# EAGLE board A20-OLinuXino-Lime2_SHIELD_TEMPLATE_Rev-AA (EAGLE 4.16)

No outline drawn. Coordinates in mm, seen from the top.
Copper layers (1*16): Top 0.035mm / dielectric 1.5mm / Bottom 0.035mm
Design rules "default": minimum track width 10mil, minimum drill 24mil, track to track 8mil, track to pad 8mil, pad to pad 8mil, via to via 8mil, smd to smd 8mil, copper to edge 40mil, drill to drill 8mil, minimum pad ring 10mil, minimum via ring 8mil, stop-mask expansion 4mil, vias tented up to drill 0mil, thermal gap 10mil

## Footprints (pad centres in the part's own frame; a part is rotated, then mirrored left to right if it is on the bottom)
A20_OLINUXINO_LIME2_SHIELD = smd 0.7 x 1.8 bottom: 1-1 -11.874,18.352; 1-2 -11.874,22.416; 1-3 -10.604,18.352; 1-4 -10.604,22.416; 1-5 -9.335,18.352; 1-6 -9.335,22.416; 1-7 -8.065,18.352; 1-8 -8.065,22.416; 1-9 -6.795,18.352; 1-10 -6.795,22.416; 1-11 -5.524,18.352; 1-12 -5.524,22.416; 1-13 -4.255,18.352; 1-14 -4.255,22.416; 1-15 -2.985,18.352; 1-16 -2.985,22.416; 1-17 -1.714,18.352; 1-18 -1.714,22.416; 1-19 -0.445,18.352; 1-20 -0.445,22.416; 1-21 0.826,18.352; 1-22 0.826,22.416; 1-23 2.095,18.352; 1-24 2.095,22.416; 1-25 3.365,18.352; 1-26 3.365,22.416; 1-27 4.636,18.352; 1-28 4.636,22.416; 1-29 5.905,18.352; 1-30 5.905,22.416; 1-31 7.176,18.352; 1-32 7.176,22.416; 1-33 8.445,18.352; 1-34 8.445,22.416; 1-35 9.716,18.352; 1-36 9.716,22.416; 1-37 10.986,18.352; 1-38 10.986,22.416; 1-39 12.255,18.352; 1-40 12.255,22.416; 2-1 -11.874,-22.288; 2-2 -11.874,-18.224; 2-3 -10.604,-22.288; 2-4 -10.604,-18.224; 2-5 -9.335,-22.288; 2-6 -9.335,-18.224; 2-7 -8.065,-22.288; 2-8 -8.065,-18.224; 2-9 -6.795,-22.288; 2-10 -6.795,-18.224; 2-11 -5.524,-22.288; 2-12 -5.524,-18.224; 2-13 -4.255,-22.288; 2-14 -4.255,-18.224; 2-15 -2.985,-22.288; 2-16 -2.985,-18.224; 2-17 -1.714,-22.288; 2-18 -1.714,-18.224; 2-19 -0.445,-22.288; 2-20 -0.445,-18.224; 2-21 0.826,-22.288; 2-22 0.826,-18.224; 2-23 2.095,-22.288; 2-24 2.095,-18.224; 2-25 3.365,-22.288; 2-26 3.365,-18.224; 2-27 4.636,-22.288; 2-28 4.636,-18.224; 2-29 5.905,-22.288; 2-30 5.905,-18.224; 2-31 7.176,-22.288; 2-32 7.176,-18.224; 2-33 8.445,-22.288; 2-34 8.445,-18.224; 2-35 9.716,-22.288; 2-36 9.716,-18.224; 2-37 10.986,-22.288; 2-38 10.986,-18.224; 2-39 12.255,-22.288; 2-40 12.255,-18.224; 3-1 -4.889,-28.639; 3-2 -4.889,-24.575; 3-3 -3.619,-28.639; 3-4 -3.619,-24.575; 3-5 -2.349,-28.639; 3-6 -2.349,-24.575; 3-7 -1.079,-28.639; 3-8 -1.079,-24.575; 3-9 0.191,-28.639; 3-10 0.191,-24.575; 3-11 1.46,-28.639; 3-12 1.46,-24.575; 3-13 2.731,-28.639; 3-14 2.731,-24.575; 3-15 4,-28.639; 3-16 4,-24.575; 3-17 5.271,-28.639; 3-18 5.271,-24.575; 3-19 6.54,-28.639; 3-20 6.54,-24.575; 3-21 7.811,-28.639; 3-22 7.811,-24.575; 3-23 9.081,-28.639; 3-24 9.081,-24.575; 3-25 10.351,-28.639; 3-26 10.351,-24.575; 3-27 11.62,-28.639; 3-28 11.62,-24.575; 3-29 12.89,-28.639; 3-30 12.89,-24.575; 3-31 14.161,-28.639; 3-32 14.161,-24.575; 3-33 15.431,-28.639; 3-34 15.431,-24.575; 3-35 16.701,-28.639; 3-36 16.701,-24.575; 3-37 17.971,-28.639; 3-38 17.971,-24.575; 3-39 19.241,-28.639; 3-40 19.241,-24.575; D-1 -4.889,24.701; D-2 -4.889,28.765; D-3 -3.619,24.701; D-4 -3.619,28.765; D-5 -2.349,24.701; D-6 -2.349,28.765; D-7 -1.079,24.701; D-8 -1.079,28.765; D-9 0.191,24.701; D-10 0.191,28.765; D-11 1.46,24.701; D-12 1.46,28.765; D-13 2.731,24.701; D-14 2.731,28.765; D-15 4,24.701; D-16 4,28.765; D-17 5.271,24.701; D-18 5.271,28.765; D-19 6.54,24.701; D-20 6.54,28.765; D-21 7.811,24.701; D-22 7.811,28.765; D-23 9.081,24.701; D-24 9.081,28.765; D-25 10.351,24.701; D-26 10.351,28.765; D-27 11.62,24.701; D-28 11.62,28.765; D-29 12.89,24.701; D-30 12.89,28.765; D-31 14.161,24.701; D-32 14.161,28.765; D-33 15.431,24.701; D-34 15.431,28.765; D-35 16.701,24.701; D-36 16.701,28.765; D-37 17.971,24.701; D-38 17.971,28.765; D-39 19.241,24.701; D-40 19.241,28.765 | smd 1.8 x 0.7 bottom: 4-1 -21.018,17.59; 4-2 -25.082,17.59; 4-3 -21.018,18.86; 4-4 -25.082,18.86; 4-5 -21.018,20.13; 4-6 -25.082,20.13; 4-7 -21.018,21.399; 4-8 -25.082,21.399; 4-9 -21.018,22.669; 4-10 -25.082,22.669; 4-11 -21.018,23.939; 4-12 -25.082,23.939; 4-13 -21.018,25.209; 4-14 -25.082,25.209; 4-15 -21.018,26.48; 4-16 -25.082,26.48; 4-17 -21.018,27.75; 4-18 -25.082,27.75; 4-19 -21.018,29.02; 4-20 -25.082,29.02 | hole 0.7: -11.239,20.384; 11.62,20.384; -11.239,-20.256; 11.62,-20.256; -4.255,-26.607; 18.605,-26.607; -4.255,26.733; 18.605,26.733; -23.05,18.224; -23.05,28.384

## Placement (x,y rotation side)
A20_OLINUXINO_LIME2_SHIELD  A20_OLINUXINO_LIME2_SHIELD_TEMPLATE  [A20_OLINUXINO_LIME2_SHIELD]  74.93,62.23 0 top

## Library data of the parts
A20_OLINUXINO_LIME2_SHIELD = A10_OLinuXino_LIME_SHIELD

## Nets
+5V: A20_OLINUXINO_LIME2_SHIELD.1-1 A20_OLINUXINO_LIME2_SHIELD.2-1 A20_OLINUXINO_LIME2_SHIELD.3-1 A20_OLINUXINO_LIME2_SHIELD.D-1
ECOL/LCD1_HSYNC/ATAIOR/KP_OUT6/SDC1_D2/CSI1_HSYNC/PH26: A20_OLINUXINO_LIME2_SHIELD.3-38
ECRS/LCD1_DE/ATAIORDY/KP_OUT5/SDC1_D1/CSI1_FIELD/PH25: A20_OLINUXINO_LIME2_SHIELD.3-36
EINT12/NCE4/SPI2_CS0/PC19: A20_OLINUXINO_LIME2_SHIELD.1-33
EINT13/NCE5/SPI2_CLK/PC20: A20_OLINUXINO_LIME2_SHIELD.1-35
EINT14/NCE6/SPI2_MOSI/PC21: A20_OLINUXINO_LIME2_SHIELD.1-37
EINT15/NCE7/SPI2_MISO/PC22: A20_OLINUXINO_LIME2_SHIELD.1-39
EINT28/SPI1_CS0/UART2_RTS/PI16: A20_OLINUXINO_LIME2_SHIELD.2-40
EINT29/SPI1_CLK/UART2_CTS/PI17: A20_OLINUXINO_LIME2_SHIELD.2-38
EINT30/SPI1_MOSI/UART2_TX/PI18: A20_OLINUXINO_LIME2_SHIELD.2-36
EINT31/SPI1_MISO/UART2_RX/PI19: A20_OLINUXINO_LIME2_SHIELD.2-34
EMDC/LCD1_D21/ATADREQ/CAN_RX/EINT21/CSI1_D21/PH21: A20_OLINUXINO_LIME2_SHIELD.3-35
EMDIO/LCD1_D22/ATADACK/KP_OUT2/SDC1_CMD/CSI1_D22/PH22: A20_OLINUXINO_LIME2_SHIELD.3-37
ERXCK/LCD1_D18/ATAD14/KP_OUT0/SMC_SLK/EINT18/CSI1_D18/PH18: A20_OLINUXINO_LIME2_SHIELD.3-29
ERXD0/LCD1_D11/ATAD7/KP_IN3/MS_D3/EINT11/CSI1_D11/PH11: A20_OLINUXINO_LIME2_SHIELD.3-15
ERXD1/LCD1_D10/ATAD6/KP_IN2/MS_D2/EINT10/CSI1_D10/PH10: A20_OLINUXINO_LIME2_SHIELD.3-13
ERXD2/LCD1_D9/ATAD5/KP_IN1/MS_D1/EINT9/CSI1_D9/PH9: A20_OLINUXINO_LIME2_SHIELD.3-11
ERXD3/LCD1_D8/ATAD4/KP_IN0/MS_D0/EINT8/CSI1_D8/PH8: A20_OLINUXINO_LIME2_SHIELD.D-35
ERXDV/LCD1_D20/ATAOE/CAN_TX/EINT20/CSI1_D20/PH20: A20_OLINUXINO_LIME2_SHIELD.3-33
ERXERR/LCD1_D19/ATAD15/KP_OUT1/SMC_SDA/EINT19/CSI1_D19/PH19: A20_OLINUXINO_LIME2_SHIELD.3-31
ETEN/LCD1_D23/ATACS0/KP_OUT3/SDC1_CLK/CSI1_D23/PH23: A20_OLINUXINO_LIME2_SHIELD.3-39
ETXCK/LCD1_CLK/ATACS1/KP_OUT4/SDC1_D0/CSI1_PCLK/PH24: A20_OLINUXINO_LIME2_SHIELD.3-34
ETXD0/LCD1_D17/ATAD13/KP_IN7/SMC_VCCEN/EINT17/CSI1_D17/PH17: A20_OLINUXINO_LIME2_SHIELD.3-27
ETXD1/LCD1_D16/ATAD12/KP_IN6/SMC_DET/EINT16/CSI1_D16/PH16: A20_OLINUXINO_LIME2_SHIELD.3-25
ETXD2/LCD1_D15/ATAD11/KP_IN5/SMC_VPPPP/EINT15/CSI1_D15/PH15: A20_OLINUXINO_LIME2_SHIELD.3-23
ETXD3/LCD1_D14/ATAD10/KP_IN4/SMC_VPPEN/EINT14/CSI1_D14/PH14: A20_OLINUXINO_LIME2_SHIELD.3-21
ETXERR/LCD1_VSYNC/ATAIOW/KP_OUT7/SDC1_D3/CSI1_VSYNC/PH27: A20_OLINUXINO_LIME2_SHIELD.3-40
FMINL: A20_OLINUXINO_LIME2_SHIELD.4-19
FMINR: A20_OLINUXINO_LIME2_SHIELD.4-17
GND: A20_OLINUXINO_LIME2_SHIELD.1-2 A20_OLINUXINO_LIME2_SHIELD.2-2 A20_OLINUXINO_LIME2_SHIELD.3-2 A20_OLINUXINO_LIME2_SHIELD.4-2 A20_OLINUXINO_LIME2_SHIELD.D-2 A20_OLINUXINO_LIME2_SHIELD.D-4
GNDA: A20_OLINUXINO_LIME2_SHIELD.1-4
GNULL/ERXERR/I²S1_MCLK/ERXERR/SPI3_CS1/PA9: A20_OLINUXINO_LIME2_SHIELD.4-12
GNULL/ETXCK/I²S1_BCLK/ETXCK/UART7_TX/UART1_DTR/PA14: A20_OLINUXINO_LIME2_SHIELD.4-14
GPS_CLK/PI0: A20_OLINUXINO_LIME2_SHIELD.2-9
GPS_MAG/PI2: A20_OLINUXINO_LIME2_SHIELD.2-13
GPS_SIGN/PI1: A20_OLINUXINO_LIME2_SHIELD.2-11
HPCOM/HPCOMFB: A20_OLINUXINO_LIME2_SHIELD.1-16
HPOUTL: A20_OLINUXINO_LIME2_SHIELD.1-14
HPOUTR: A20_OLINUXINO_LIME2_SHIELD.1-18
HSCL/UART7_TX/PS2_SCK0/PI20: A20_OLINUXINO_LIME2_SHIELD.2-32
HSDA/UART7_RX/PS2_SDA0/PI21: A20_OLINUXINO_LIME2_SHIELD.2-30
I2S_BCLK/AC97_BCLK/PB6: A20_OLINUXINO_LIME2_SHIELD.3-10
I2S_DI/AC97_DI/SPDIF_DI/PB12: A20_OLINUXINO_LIME2_SHIELD.3-22
I2S_DO0/AC97_DO/PB8/SATA-PWR-EN: A20_OLINUXINO_LIME2_SHIELD.3-14
I2S_DO1/PB9: A20_OLINUXINO_LIME2_SHIELD.3-16
I2S_DO2/PB10: A20_OLINUXINO_LIME2_SHIELD.3-18
I2S_DO3/PB11: A20_OLINUXINO_LIME2_SHIELD.3-20
I2S_LRCK/AC97_SYNC/PB7: A20_OLINUXINO_LIME2_SHIELD.3-12
I2S_MCLK/AC97_MCLK/PB5: A20_OLINUXINO_LIME2_SHIELD.3-8
IR0_RX/PB4: A20_OLINUXINO_LIME2_SHIELD.3-6
IR0_TX/SPDIF_MCLK/STANBYWFI/PB3: A20_OLINUXINO_LIME2_SHIELD.3-4
JTAG_CK0/SPI2_CLK/PB15: A20_OLINUXINO_LIME2_SHIELD.3-28
JTAG_DI0/SPI2_MISO/PB17: A20_OLINUXINO_LIME2_SHIELD.3-32
JTAG_DO0/SPI2_MOSI/PB16: A20_OLINUXINO_LIME2_SHIELD.3-30
JTAG_MS0/SPI2_CS0/PB14: A20_OLINUXINO_LIME2_SHIELD.3-26
LCD0_CLK/SMC_VCCEN/PD24: A20_OLINUXINO_LIME2_SHIELD.D-31
LCD0_D0/LVDS0_VP0/PD0: A20_OLINUXINO_LIME2_SHIELD.D-21
LCD0_D1/LVDS0_VN0/PD1: A20_OLINUXINO_LIME2_SHIELD.D-22
LCD0_D2/LVDS0_VP1/PD2: A20_OLINUXINO_LIME2_SHIELD.D-23
LCD0_D3/LVDS0_VN1/PD3: A20_OLINUXINO_LIME2_SHIELD.D-24
LCD0_D4/LVDS0_VP2/PD4: A20_OLINUXINO_LIME2_SHIELD.D-25
LCD0_D5/LVDS0_VN2/PD5: A20_OLINUXINO_LIME2_SHIELD.D-26
LCD0_D6/LVDS0_VPC/PD6: A20_OLINUXINO_LIME2_SHIELD.D-27
LCD0_D7/LVDS0_VNC/PD7: A20_OLINUXINO_LIME2_SHIELD.D-28
LCD0_D8/LVDS0_VP3/PD8: A20_OLINUXINO_LIME2_SHIELD.D-13
LCD0_D9/LVDS0_VN3/PD9: A20_OLINUXINO_LIME2_SHIELD.D-14
LCD0_D10/LVDS1_VP0/PD10: A20_OLINUXINO_LIME2_SHIELD.D-15
LCD0_D11/LVDS1_VN0/PD11: A20_OLINUXINO_LIME2_SHIELD.D-16
LCD0_D12/LVDS1_VP1/PD12: A20_OLINUXINO_LIME2_SHIELD.D-17
LCD0_D13/LVDS1_VN1/PD13: A20_OLINUXINO_LIME2_SHIELD.D-18
LCD0_D14/LVDS1_VP2/PD14: A20_OLINUXINO_LIME2_SHIELD.D-19
LCD0_D15/LVDS1_VN2/PD15: A20_OLINUXINO_LIME2_SHIELD.D-20
LCD0_D16/LVDS1_VPC/PD16: A20_OLINUXINO_LIME2_SHIELD.D-5
LCD0_D17/LVDS1_VNC/PD17: A20_OLINUXINO_LIME2_SHIELD.D-6
LCD0_D18/LVDS1_VP3/PD18: A20_OLINUXINO_LIME2_SHIELD.D-7
LCD0_D19/LVDS1_VN3/PD19: A20_OLINUXINO_LIME2_SHIELD.D-8
LCD0_D20/CSI1_MCLK/PD20: A20_OLINUXINO_LIME2_SHIELD.D-9
LCD0_D21/SMC_VPPEN/PD21: A20_OLINUXINO_LIME2_SHIELD.D-10
LCD0_D22/SMC_VPPPP/PD22: A20_OLINUXINO_LIME2_SHIELD.D-11
LCD0_D23/SMC_DET/PD23: A20_OLINUXINO_LIME2_SHIELD.D-12
LCD0_DE/SMC_RST/PD25: A20_OLINUXINO_LIME2_SHIELD.D-32
LCD0_HSYNC/SMC_SLK/PD26: A20_OLINUXINO_LIME2_SHIELD.D-29
LCD0_VSYNC/SMC_SDA/PD27: A20_OLINUXINO_LIME2_SHIELD.D-30
LCD1_D0/ATAA0/UART3_TX/EINT0/CSI1_D0/PH0: A20_OLINUXINO_LIME2_SHIELD.3-7
LCD1_D7/ATAD3/UART5_RX/MS_CLK/EINT7/CSI1_D7/PH7/I2S_DO1/PB9/USB0-DRV: A20_OLINUXINO_LIME2_SHIELD.3-9
LCD1_D12/ATAD8/PS2_SCK1/EINT12/CSI1_D12/PH12: A20_OLINUXINO_LIME2_SHIELD.3-17
LCD1_D13/ATAD9/PS2_SDA1/SMC_RST/EINT13/CSI1_D13/PH13: A20_OLINUXINO_LIME2_SHIELD.3-19
LDO3_2.8V/VCC_CSI0: A20_OLINUXINO_LIME2_SHIELD.2-4
LINEINL: A20_OLINUXINO_LIME2_SHIELD.4-15
LINEINR: A20_OLINUXINO_LIME2_SHIELD.4-13
LRADC0: A20_OLINUXINO_LIME2_SHIELD.1-6
LRADC1: A20_OLINUXINO_LIME2_SHIELD.1-8
MIC1OUTN: A20_OLINUXINO_LIME2_SHIELD.4-8
MIC1OUTP: A20_OLINUXINO_LIME2_SHIELD.4-6
MICIN1: A20_OLINUXINO_LIME2_SHIELD.1-10
MICIN2: A20_OLINUXINO_LIME2_SHIELD.4-10
NC/IR0_RX/PB4: A20_OLINUXINO_LIME2_SHIELD.D-34
NC/IR0_TX/SPDIF_MCLK/STANBYWFI/PB3: A20_OLINUXINO_LIME2_SHIELD.D-33
NCE1/PC3/SATA-PWR-EN: A20_OLINUXINO_LIME2_SHIELD.1-29
NCE2/PC17: A20_OLINUXINO_LIME2_SHIELD.4-20
NCE3/PC18: A20_OLINUXINO_LIME2_SHIELD.1-31
NDQS/PC24: A20_OLINUXINO_LIME2_SHIELD.1-38
NMI_N: A20_OLINUXINO_LIME2_SHIELD.4-4
NRB1/SDC2_CLK/PC7: A20_OLINUXINO_LIME2_SHIELD.4-16
NWP/PC16: A20_OLINUXINO_LIME2_SHIELD.4-18
PB2/PWM0: A20_OLINUXINO_LIME2_SHIELD.D-36
PS2_SCK1/TCLKIN0/EINT26/SPI0_CS1/PI14: A20_OLINUXINO_LIME2_SHIELD.2-37
PS2_SDA1/TCLKIN1/EINT27/SPI1_CS1/PI15: A20_OLINUXINO_LIME2_SHIELD.2-39
PWM1/PI3: A20_OLINUXINO_LIME2_SHIELD.2-15
RESET_N: A20_OLINUXINO_LIME2_SHIELD.3-5
SDC3_CLK/PI5: A20_OLINUXINO_LIME2_SHIELD.2-19
SDC3_CMD/PI4: A20_OLINUXINO_LIME2_SHIELD.2-17
SDC3_D0/PI6: A20_OLINUXINO_LIME2_SHIELD.2-21
SDC3_D1/PI7: A20_OLINUXINO_LIME2_SHIELD.2-23
SDC3_D2/PI8: A20_OLINUXINO_LIME2_SHIELD.2-25
SDC3_D3/PI9: A20_OLINUXINO_LIME2_SHIELD.2-27
SPI0_CLK/UART5_RX/EINT23/PI11: A20_OLINUXINO_LIME2_SHIELD.2-31
SPI0_CS0/PC23: A20_OLINUXINO_LIME2_SHIELD.1-40
SPI0_CS0/UART5_TX/EINT22/PI10: A20_OLINUXINO_LIME2_SHIELD.2-29
SPI0_MISO/UART6_RX/EINT25/PI13: A20_OLINUXINO_LIME2_SHIELD.2-35
SPI0_MOSI/UART6_TX/EINT24/PI12: A20_OLINUXINO_LIME2_SHIELD.2-33
SPI2_CS1/SPDIF_DO/PB13: A20_OLINUXINO_LIME2_SHIELD.3-24
TS0_CLK/CSI0_PCLK/PE0: A20_OLINUXINO_LIME2_SHIELD.2-6
TS0_D0/CSI0_D0/PE4: A20_OLINUXINO_LIME2_SHIELD.2-14
TS0_D1/CSI0_D1/PE5: A20_OLINUXINO_LIME2_SHIELD.2-16
TS0_D2/CSI0_D2/PE6: A20_OLINUXINO_LIME2_SHIELD.2-18
TS0_D3/CSI0_D3/PE7: A20_OLINUXINO_LIME2_SHIELD.2-20
TS0_D4/CSI0_D4/PE8: A20_OLINUXINO_LIME2_SHIELD.2-22
TS0_D5/CSI0_D5/PE9: A20_OLINUXINO_LIME2_SHIELD.2-24
TS0_D6/CSI0_D6/PE10: A20_OLINUXINO_LIME2_SHIELD.2-26
TS0_D7/CSI0_D7/PE11: A20_OLINUXINO_LIME2_SHIELD.2-28
TS0_DVLD/CSI0_VSYNC/PE3: A20_OLINUXINO_LIME2_SHIELD.2-12
TS0_ERR/CSI0_MCLK/PE1: A20_OLINUXINO_LIME2_SHIELD.2-8
TS0_SYNC/CSI0_HSYNC/PE2: A20_OLINUXINO_LIME2_SHIELD.2-10
TS1_CLK/CSI1_PCLK/SDC1_CMD/PG0: A20_OLINUXINO_LIME2_SHIELD.1-5
TS1_D0/CSI1_D0/SDC1_D2/CSI0_D8/PG4: A20_OLINUXINO_LIME2_SHIELD.1-13
TS1_D1/CSI1_D1/SDC1_D3/CSI0_D9/PG5: A20_OLINUXINO_LIME2_SHIELD.1-15
TS1_D2/CSI1_D2/UART3_TX/CSI0_D10/PG6: A20_OLINUXINO_LIME2_SHIELD.1-17
TS1_D3/CSI1_D3/UART3_RX/CSI0_D11/PG7: A20_OLINUXINO_LIME2_SHIELD.1-19
TS1_D4/CSI1_D4/UART3_RTS/CSI0_D12/PG8: A20_OLINUXINO_LIME2_SHIELD.1-21
TS1_D5/CSI1_D5/UART3_CTS/CSI0_D13/PG9: A20_OLINUXINO_LIME2_SHIELD.1-23
TS1_D6/CSI1_D6/UART4_TX/CSI0_D14/PG10: A20_OLINUXINO_LIME2_SHIELD.1-25
TS1_D7/CSI1_D7/UART4_RX/CSI0_D15/PG11: A20_OLINUXINO_LIME2_SHIELD.1-27
TS1_DVLD/CSI1_VSYNC/SDC1_D1/PG3: A20_OLINUXINO_LIME2_SHIELD.1-11
TS1_ERR/CSI1_MLCK/SDC1_CLK/PG1: A20_OLINUXINO_LIME2_SHIELD.1-7
TS1_SYNC/CSI1_HSYNC/SDC1_D0/PG2: A20_OLINUXINO_LIME2_SHIELD.1-9
TVIN0: A20_OLINUXINO_LIME2_SHIELD.4-5
TVIN1: A20_OLINUXINO_LIME2_SHIELD.4-7
TVIN2: A20_OLINUXINO_LIME2_SHIELD.4-9
TVIN3: A20_OLINUXINO_LIME2_SHIELD.4-11
TVOUT0/VGA-G: A20_OLINUXINO_LIME2_SHIELD.1-20
TVOUT1/VGA-B: A20_OLINUXINO_LIME2_SHIELD.1-22
TVOUT2/VGA-R: A20_OLINUXINO_LIME2_SHIELD.1-24
TVOUT3: A20_OLINUXINO_LIME2_SHIELD.4-3
TWI0_SCK/PB0: A20_OLINUXINO_LIME2_SHIELD.2-5
TWI0_SDA/PB1: A20_OLINUXINO_LIME2_SHIELD.2-7
TWI1_SCK/PB18: A20_OLINUXINO_LIME2_SHIELD.1-36
TWI1_SDA/PB19: A20_OLINUXINO_LIME2_SHIELD.1-34
TWI2_SCK/PB20: A20_OLINUXINO_LIME2_SHIELD.1-32
TWI2_SDA/PB21: A20_OLINUXINO_LIME2_SHIELD.1-30
UART0_RX/IR1_RX/PB23: A20_OLINUXINO_LIME2_SHIELD.1-26
UART0_TX/IR1_TX/PB22: A20_OLINUXINO_LIME2_SHIELD.1-28
VCC: A20_OLINUXINO_LIME2_SHIELD.1-3 A20_OLINUXINO_LIME2_SHIELD.2-3 A20_OLINUXINO_LIME2_SHIELD.3-3 A20_OLINUXINO_LIME2_SHIELD.4-1 A20_OLINUXINO_LIME2_SHIELD.D-3
VMIC: A20_OLINUXINO_LIME2_SHIELD.1-12
XN_TP: A20_OLINUXINO_LIME2_SHIELD.D-38
XP_TP: A20_OLINUXINO_LIME2_SHIELD.D-37
YN_TP: A20_OLINUXINO_LIME2_SHIELD.D-40
YP_TP: A20_OLINUXINO_LIME2_SHIELD.D-39

## Tracks (layer width: path | path; a pad name or v marks a point on that pad's centre or on a via)
+5V  (3 unrouted)
GND  (5 unrouted)
VCC  (4 unrouted)